# EAGLE board tiny_proto (EAGLE 4.15)
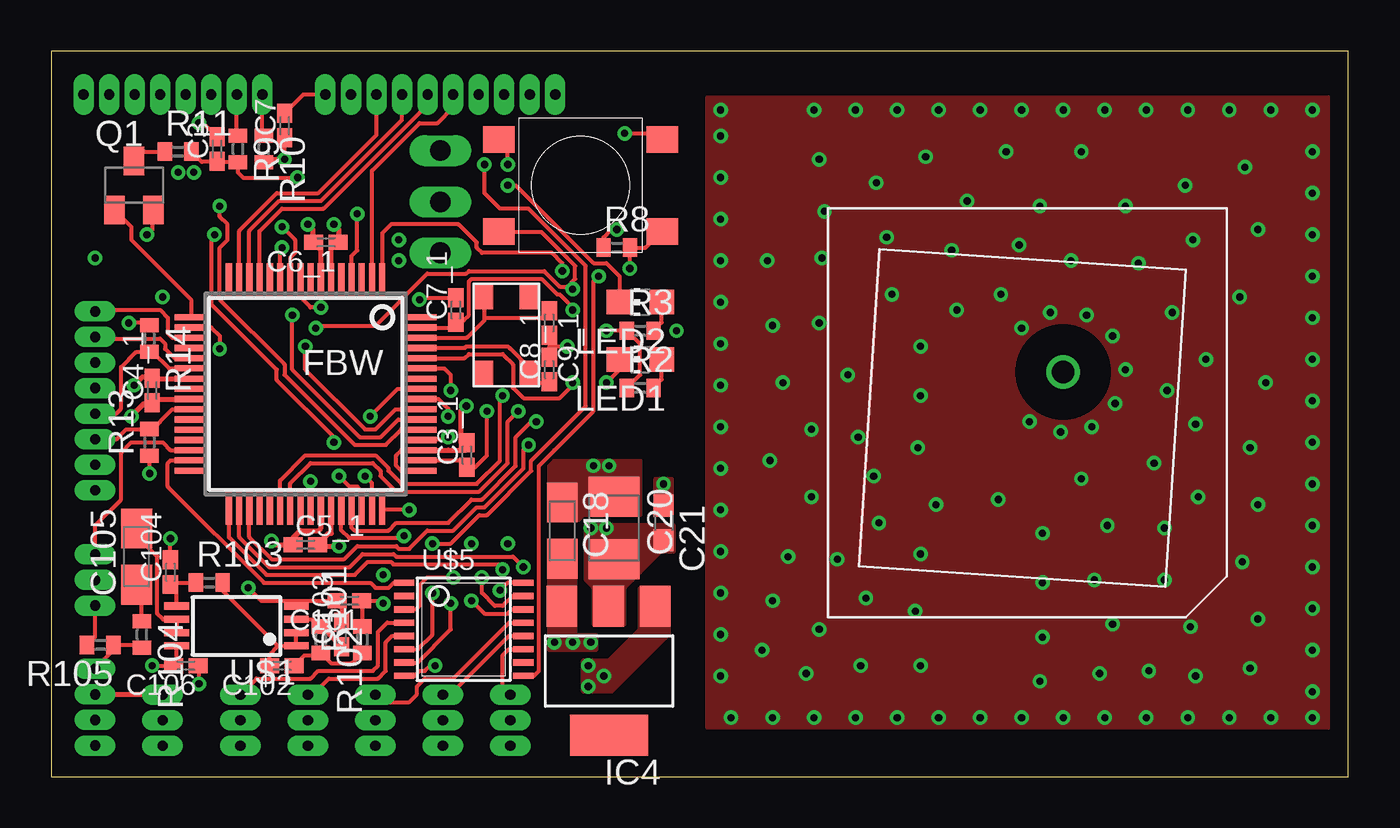
[diagram p0: board, top side]
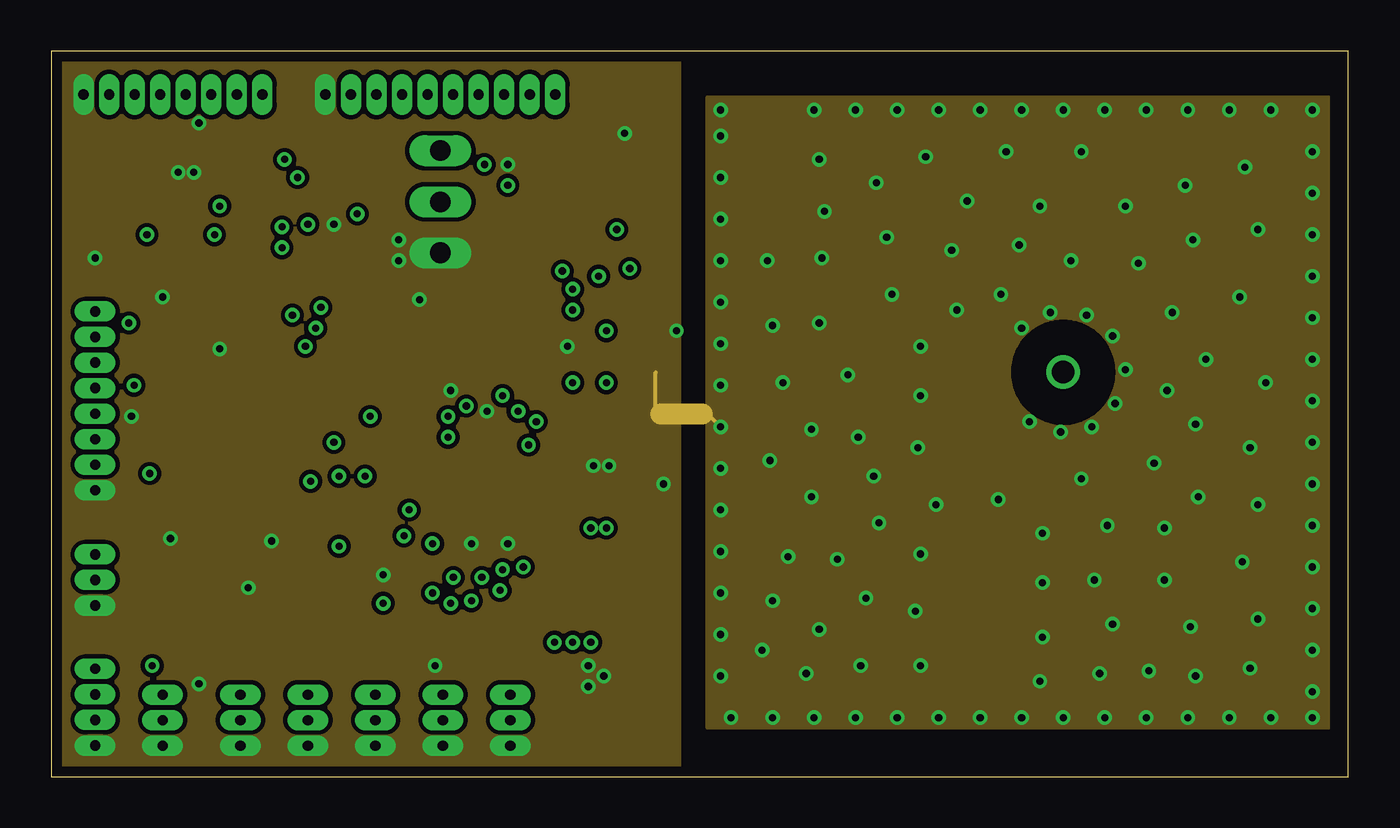
[diagram p1: board, inner layer Route2]
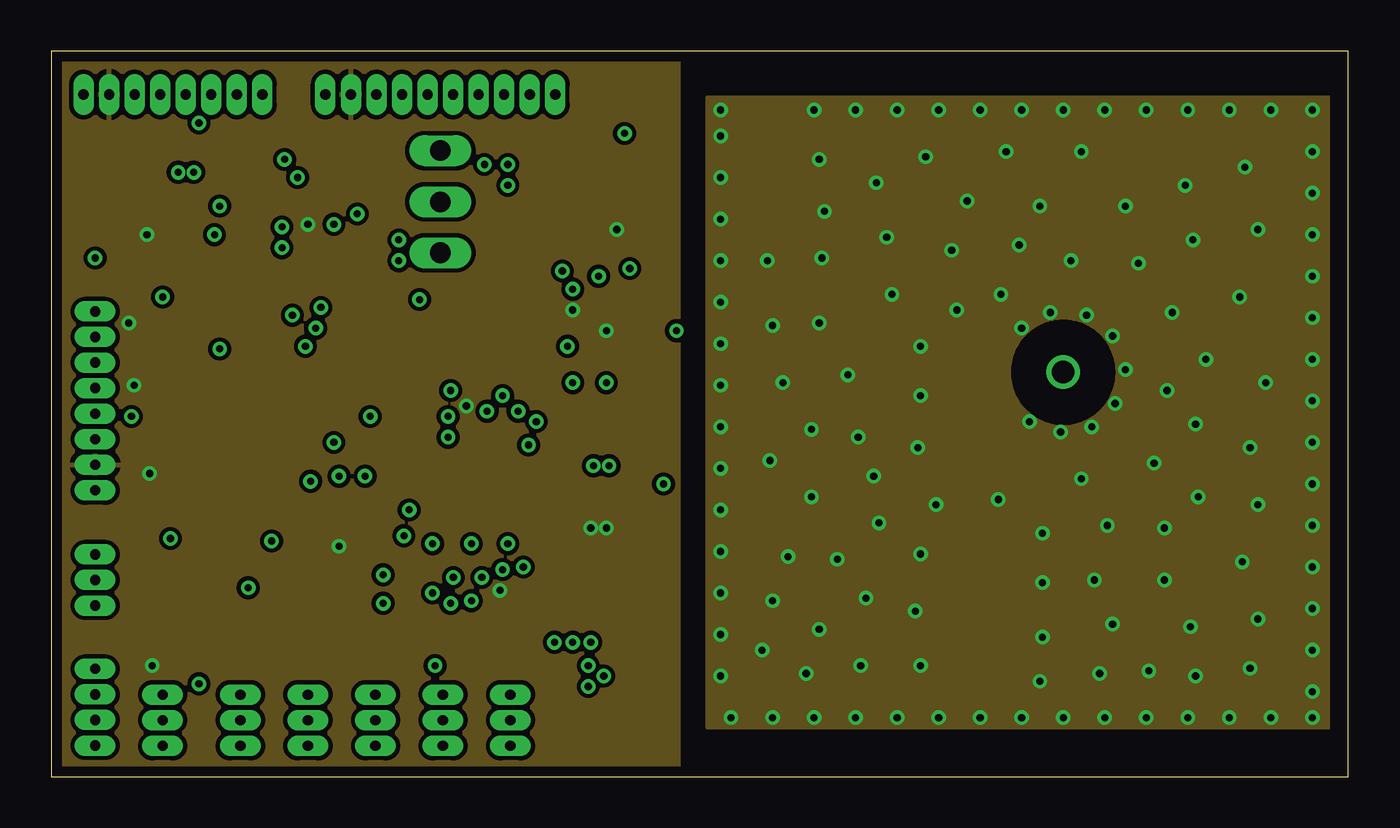
[diagram p2: board, inner layer Route15]
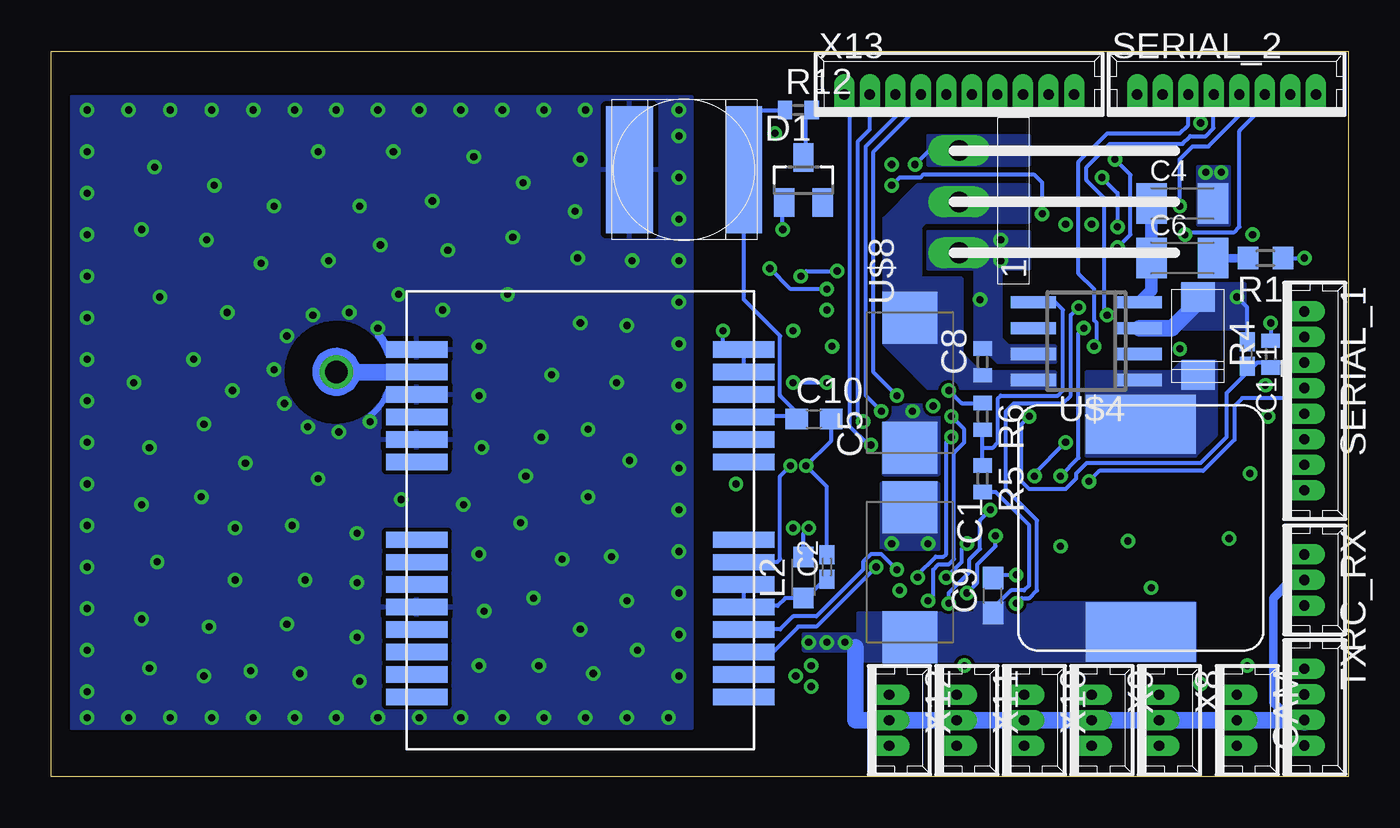
[diagram p3: board, bottom side, seen from below]

Size 63.48 x 35.48 mm. Coordinates in mm from the lower left corner, seen from the top.
Outline: 0,0 63.48,0 63.48,35.48 0,35.48 0,0
Copper layers (1*2+15*16): Top 0.035mm / dielectric 0.2mm / Route2 0.035mm / dielectric 1.5mm / Route15 0.035mm / dielectric 0.2mm / Bottom 0.035mm
Design rules "eurocircuits_verified_4l": minimum track width 0.15mm, minimum drill 0.35mm, track to track 0.15mm, track to pad 0.15mm, pad to pad 0.15mm, via to via 0.15mm, smd to smd 0.15mm, copper to edge 20mil, drill to drill 8mil, minimum pad ring 10mil, minimum via ring 7mil, stop-mask expansion 4mil, vias tented up to drill 0mil, thermal gap 10mil
tRestrict: area 47.5,17.8 to 51.6,21.8; area 48.2,18.4 to 50.9,21.2
bRestrict: 4 lines

## Footprints (pad centres in the part's own frame; a part is rotated, then mirrored left to right if it is on the bottom)
D/7343-31R = smd 2.55 x 2.7: + 3.175,0; - -3.175,0
C0402K = smd 0.925 x 0.74: 1 -0.6,0; 2 0.6,0
C1206K = smd 1.5 x 2: 1 -1.5,0; 2 1.5,0
C0402 = smd 0.7 x 0.9: 1 -0.65,0; 2 0.65,0
C0603 = smd 1.1 x 1: 1 -0.85,0; 2 0.85,0
A/3216-18R = smd 1.95 x 1.5: + 1.375,0; - -1.375,0
B/3528-21R = smd 1.95 x 2.5: + 1.525,0; - -1.525,0
PANA_J1 = smd 6.2 x 2.3: MINUS 0,-2.667 | smd 6.2 x 1.8: PLUS 0,2.921
53047-03 = drill 0.5 pad 0.698 long: 1 1.25,0; 2 0,0; 3 -1.25,0
SOT23 = smd 1 x 1.4: 1 -0.95,-1.1; 2 0.95,-1.1; 3 0,1.1
SQFP-S-10X10-64 = smd 0.3 x 1.6: 1 -3.75,-5.6; 2 -3.25,-5.6; 3 -2.75,-5.6; 4 -2.25,-5.6; 5 -1.75,-5.6; 6 -1.25,-5.6; 7 -0.75,-5.6; 8 -0.25,-5.6; 9 0.25,-5.6; 10 0.75,-5.6; 11 1.25,-5.6; 12 1.75,-5.6; 13 2.25,-5.6; 14 2.75,-5.6; 15 3.25,-5.6; 16 3.75,-5.6; 33 3.75,5.6; 34 3.25,5.6; 35 2.75,5.6; 36 2.25,5.6; 37 1.75,5.6; 38 1.25,5.6; 39 0.75,5.6; 40 0.25,5.6; 41 -0.25,5.6; 42 -0.75,5.6; 43 -1.25,5.6; 44 -1.75,5.6; 45 -2.25,5.6; 46 -2.75,5.6; 47 -3.25,5.6; 48 -3.75,5.6 | smd 1.6 x 0.3: 17 5.6,-3.75; 18 5.6,-3.25; 19 5.6,-2.75; 20 5.6,-2.25; 21 5.6,-1.75; 22 5.6,-1.25; 23 5.6,-0.75; 24 5.6,-0.25; 25 5.6,0.25; 26 5.6,0.75; 27 5.6,1.25; 28 5.6,1.75; 29 5.6,2.25; 30 5.6,2.75; 31 5.6,3.25; 32 5.6,3.75; 49 -5.6,3.75; 50 -5.6,3.25; 51 -5.6,2.75; 52 -5.6,2.25; 53 -5.6,1.75; 54 -5.6,1.25; 55 -5.6,0.75; 56 -5.6,0.25; 57 -5.6,-0.25; 58 -5.6,-0.75; 59 -5.6,-1.25; 60 -5.6,-1.75; 61 -5.6,-2.25; 62 -5.6,-2.75; 63 -5.6,-3.25; 64 -5.6,-3.75
SOT223 = smd 1.499 x 2.007: 1 -2.261,-3.15; 2 0.025,-3.15; 3 2.311,-3.15 | smd 3.81 x 2.007: 4 0,3.15
WE_PD = smd 2.9 x 5.4: P$1 -5.08,0; P$2 5.08,0
L2012C = smd 1 x 1: 1 -1,0; 2 1,0
CHIP-LED0805 = smd 1.2 x 1.2: A 0,-1.05; C 0,1.05
SC59-BEC = smd 1 x 1.4: B -0.95,-1.2; C 0,1.2; E 0.95,-1.2
R0603 = smd 1 x 1.1: 1 -0.85,0; 2 0.85,0
R1005 = smd 0.7 x 0.9: 1 -0.65,0; 2 0.65,0
R0402 = smd 0.7 x 0.9: 1 -0.65,0; 2 0.65,0
53047-08 = drill 0.5 pad 0.698 long: 1 4.375,0; 2 3.125,0; 3 1.875,0; 4 0.625,0; 5 -0.625,0; 6 -1.875,0; 7 -3.125,0; 8 -4.375,0
B3S = smd 1.55 x 1.3: P$1 4,-2.25; P$2 -4,-2.25; P$3 4,2.25; P$4 -4,2.25
53047-04 = drill 0.5 pad 0.698 long: 1 1.875,0; 2 0.625,0; 3 -0.625,0; 4 -1.875,0
TSSOP8 = smd 0.35 x 1.2: 1 -0.975,-2.925; 2 -0.325,-2.925; 3 0.325,-2.925; 4 0.975,-2.925; 5 0.975,2.925; 6 0.325,2.925; 7 -0.325,2.925; 8 -0.975,2.925
SMA = smd 1.45 x 1.65: P$1 -1.905,0; P$2 1.905,0
SO08 = smd 0.6 x 2.2: 1 -1.905,-2.6; 2 -0.635,-2.6; 3 0.635,-2.6; 4 1.905,-2.6; 5 1.905,2.6; 6 0.635,2.6; 7 -0.635,2.6; 8 -1.905,2.6
TSSOP16 = smd 0.305 x 0.991: 1 -2.275,-2.918; 2 -1.625,-2.918; 3 -0.975,-2.918; 4 -0.325,-2.918; 5 0.325,-2.918; 6 0.975,-2.918; 7 1.625,-2.918; 8 2.275,-2.918; 9 2.275,2.918; 10 1.625,2.918; 11 0.975,2.918; 12 0.325,2.918; 13 -0.325,2.918; 14 -0.975,2.918; 15 -1.625,2.918; 16 -2.275,2.918
LEA-LA = smd 3 x 0.8: 1 8,-8.65; 2 8,-7.55; 3 8,-6.45; 4 8,-5.35; 5 8,-4.25; 6 8,-3.15; 7 8,-2.05; 8 8,-0.95; 9 8,2.85; 10 8,3.95; 11 8,5.05; 12 8,6.15; 13 8,7.25; 14 8,8.35; 15 -8,8.35; 16 -8,7.25; 17 -8,6.15; 18 -8,5.05; 19 -8,3.95; 20 -8,2.85; 21 -8,-0.95; 22 -8,-2.05; 23 -8,-3.15; 24 -8,-4.25; 25 -8,-5.35; 26 -8,-6.45; 27 -8,-7.55; 28 -8,-8.65
FUTABA_BENDED = drill 1.016 long: 1 -2.54,5.715; 2 -0.051,5.715; 3 2.464,5.715
GPS_ANT_SMALL = drill 1.1 pad 1.4 round: P$1 -2,-2
CTS_CRYSTAL = smd 1.2 x 0.9: P$1 -1.85,-1.1; P$2 1.85,-1.1; P$3 1.85,1.1; P$4 -1.85,1.1
53047-10 = drill 0.5 pad 0.698 long: 1 5.625,0; 2 4.375,0; 3 3.125,0; 4 1.875,0; 5 0.625,0; 6 -0.625,0; 7 -1.875,0; 8 -3.125,0; 9 -4.375,0; 10 -5.625,0

## Placement (x,y rotation side)
C1  330uF/10V  [D/7343-31R]  21.46,10 270 bottom
C1_1  100nF  [C0402K]  4.95,20.66 270 bottom
C2  100nF  [C0402K]  25.52,10.25 90 bottom
C3  18pF  [C0402K]  8.12,30.7 90 top
C3_1  100nF  [C0402K]  20.34,15.72 90 top
C4  220pF/50V  [C1206K]  8.12,28.03 0 bottom
C4_1  100nF  [C0402K]  4.95,18.89 90 top
C5  47uF/16V  [D/7343-31R]  21.46,19.27 90 bottom
C5_1  100nF  [C0402K]  12.45,11.34 0 top
C6  22nF/50V  [C1206K]  8.12,25.36 0 bottom
C6_1  100nF  [C0402K]  13.45,26.13 180 top
C7  18pF  [C0402K]  11.42,31.84 90 top
C7_1  100nF  [C0402K]  19.81,22.82 90 top
C8  100nF  [C0402]  17.9,20.28 90 bottom
C8_1  22pF  [C0402K]  24.38,19.9 90 top
C9  100nF  [C0603]  17.39,8.85 90 bottom
C9_1  22pF  [C0402K]  24.38,22.19 270 top
C10  18pF  [C0603]  26.16,17.49 0 bottom
C18  [A/3216-18R]  25.01,12.03 270 top
C20  [B/3528-21R]  27.55,12.15 270 top
C21  100nF  [C0603]  29.97,12.41 270 top
C77  0.2F  [PANA_J1]  32.51,29.68 270 bottom
C101  3,3nF  [C0402K]  14.6,8.6 180 top
C102  220pF  [C0402K]  11.3,5.42 180 top
C103  100pF  [C0402K]  14.22,6.95 90 top
C104  1nF  [C0402K]  5.84,10 90 top
C105  10µF  [A/3216-18R]  4.19,10.76 90 top
C106  100nF  [C0402K]  6.6,5.42 180 top
CAM  [53047-03]  5.46,2.76 270 bottom
D1  BAS70  [SOT23]  26.66,29.17 0 bottom
FBW  LPC2148  [SQFP-S-10X10-64]  12.45,18.71 180 top
IC4  REG1117  [SOT223]  27.3,5.17 180 top
L1  15uH  [WE_PD]  10.15,12.15 270 bottom
L2  [L2012C]  26.66,9.74 90 bottom
LED1  [CHIP-LED0805]  28.82,20.41 90 top
LED2  [CHIP-LED0805]  28.82,23.2 90 top
Q1  DDTA143  [SC59-BEC]  4.06,28.92 0 top
R1  4.7K  [R0603]  4.06,25.36 180 bottom
R2  1K  [R1005]  28.82,19.01 0 top
R3  1K  [R1005]  28.82,21.81 0 top
R4  10k  [R1005]  3.8,20.66 90 bottom
R5  10K  [R1005]  17.9,14.57 270 bottom
R6  3.3K  [R1005]  17.9,17.61 270 bottom
R8  1K  [R1005]  27.68,25.87 0 top
R9  33R  [R1005]  9.14,30.7 270 top
R10  33R  [R1005]  10.41,30.7 270 top
R11  1.5K  [R1005]  6.22,30.57 0 top
R12  3.3K  [R1005]  26.92,32.6 0 bottom
R13  10K  [R1005]  4.82,16.35 90 top
R14  10K  [R1005]  4.82,21.43 270 top
R101  100k  [R1005]  15.24,6.69 90 top
R102  56k  [R0402]  13.2,6.69 270 top
R103  12k  [R1005]  7.74,9.49 0 top
R104  56k  [R1005]  4.44,6.95 270 top
R105  56k  [R1005]  2.41,6.44 180 top
RC_RX  [53047-03]  2.15,9.61 270 bottom
SERIAL_1  [53047-08]  2.15,18.38 270 bottom
SERIAL_2  [53047-08]  5.96,33.36 0 bottom
SW1  B3S  [B3S]  25.9,28.92 180 top
TX  [53047-04]  2.15,3.39 270 bottom
U$1  AD8552RU  [TSSOP8]  9.07,7.37 90 top
U$2  STPS2L  [SMA]  7.36,21.55 270 bottom
U$4  L5973D  [SO08]  12.82,21.3 90 bottom
U$5  CD4015B  [TSSOP16]  20.19,7.2 270 top
U$6  LEA-4P  [LEA-LA]  37.59,12.54 0 bottom
U$8  FUTABA_BEND  [FUTABA_BENDED]  13.33,28.16 90 bottom
U$15  GPS_PATCH  [GPS_ANT_SMALL]  47.52,17.79 180 top
U$19  CRYSTAL_CTS  [CTS_CRYSTAL]  22.27,21.6 90 top
X8  [53047-03]  9.27,2.76 270 bottom
X9  [53047-03]  12.57,2.76 270 bottom
X10  [53047-03]  15.87,2.76 270 bottom
X11  [53047-03]  19.17,2.76 270 bottom
X12  [53047-03]  22.47,2.76 270 bottom
X13  [53047-10]  19.05,33.36 0 bottom

## Library data of the parts
C1 C1_1 C2 C3 C3_1 C4 C4_1 C5 C5_1 C6 C6_1 C7 C7_1 C8 C8_1 C9 C9_1 C10 C18 C20 C21 C101-C106 L2 R1-R6 R8-R14 R101-R105 = rcl
C77 FBW L1 SW1 U$1 U$2 U$4-U$6 U$8 U$15 U$19 = paparazzi
CAM RC_RX SERIAL_1 SERIAL_2 TX X8-X13 = con-molex
D1 = diode
IC4 = burr-brown
LED1 LED2 = led
Q1 = transistor-pnp

## Nets
+3V3: C3_1.2 C4_1.2 C5_1.2 C6_1.2 C7_1.1 C20.+ C21.2 C106.2 D1.1 FBW.7 FBW.23 FBW.43 FBW.49 FBW.51 FBW.63 IC4.2 L2.2 Q1.E R2.1 R3.1 R4.2 R8.1 R13.1 R14.1 SERIAL_1.2 SERIAL_2.2 U$1.8 U$5.16 X13.2
+5V: C1.+ C9.1 C18.+ CAM.2 IC4.3 L1.P$2 R5.2 RC_RX.2 TX.2 X8.2 X9.2 X10.2 X11.2 X12.2
ADC_0: FBW.15 X13.3
ADC_1: FBW.14 X13.4
ADC_2: FBW.13 X13.5
ADC_3: FBW.2 X13.6
ADC_4: FBW.38 X13.7
ADC_5: FBW.39 X13.8
ADC_6: FBW.45 X13.9
ADC_7: FBW.35 X13.10
AUDIO: R104.2 R105.1 TX.4
BUTTON: FBW.46 R8.2 SW1.P$3 SW1.P$4
GND: C1.- C1_1.1 C2.2 C3.2 C3_1.1 C4.2 C4_1.1 C5.- C5_1.1 C6_1.1 C7.2 C7_1.2 C8.2 C8_1.2 C9.2 C9_1.2 C10.2 C18.- C20.- C21.1 C77.MINUS C101.2 C103.2 C104.2 C106.1 CAM.1 FBW.6 FBW.18 FBW.25 FBW.42 FBW.50 FBW.59 IC4.1 R1.1 R6.1 R105.2 RC_RX.1 SERIAL_1.1 SERIAL_2.1 SW1.P$1 SW1.P$2 TX.1 U$1.4 U$2.P$1 U$4.3 U$4.7 U$5.8 U$6.7 U$6.13 U$6.14 U$6.15 U$6.17 U$6.19 U$6.24 U$8.1 X8.1 X9.1 X10.1 X11.1 X12.1 X13.1
LED_1: FBW.60 LED1.C
LED_2: FBW.4 LED2.C
LPC_AUDIO: C101.1 FBW.9 R101.2
LPC_CLOCK: C8_1.1 FBW.61 U$19.P$1
LPC_MISO: FBW.53 SERIAL_2.4
LPC_MOSI: FBW.54 SERIAL_2.5
LPC_P0.14: FBW.41 SERIAL_1.5
LPC_RESET: C1_1.2 FBW.57 R4.1 SERIAL_1.6
LPC_RXD_0: FBW.21 SERIAL_1.7
LPC_RXD_1: FBW.34 U$6.3
LPC_SCK: FBW.47 SERIAL_2.3
LPC_SCL0: FBW.22 R14.2 SERIAL_1.4
LPC_SDA0: FBW.26 R13.2 SERIAL_1.3
LPC_SERV0_CLOCK: FBW.1 U$5.9
LPC_SERV0_DATA: FBW.48 U$5.7
LPC_SERV0_RESET: FBW.44 U$5.6
LPC_SERV1_CLOCK: FBW.31 U$5.1
LPC_SERV1_DATA: FBW.52 U$5.15
LPC_SERV1_RESET: FBW.56 U$5.14
LPC_SSEL: FBW.55 SERIAL_2.6
LPC_TXD_0: FBW.19 SERIAL_1.8
LPC_TXD_1: FBW.33 U$6.4
LPC_USB_CONNECT: FBW.17 Q1.B
LPC_USB_N: C7.1 FBW.11 R10.2
LPC_USB_P: C3.1 FBW.10 R9.2 R11.2
N$1: C2.1 L2.1 U$6.5 U$6.6
N$3: U$6.16 U$15.P$1
N$5: C9_1.1 FBW.62 U$19.P$3
N$6: C4.1 C6.1 U$4.4
N$7: Q1.C R11.1
N$8: C6.2 R1.2
N$9: L1.P$1 U$2.P$2 U$4.1
N$10: R5.1 R6.2 U$4.5
N$11: FBW.27
N$12: FBW.29
N$14: C105.+ U$1.6 U$1.7
N$15: C102.2 R103.2 U$1.1 U$1.2
N$16: C102.1 R101.1 R102.2
N$17: C103.1 R102.1 U$1.3
N$18: C105.- R104.1
N$19: C104.1 R103.1 U$1.5
N$21: LED1.A R2.2
N$22: LED2.A R3.2
N$28: C10.1 C77.PLUS R12.1 U$6.11
N$29: D1.3 R12.2
PPM_IN: FBW.30 RC_RX.3
SERV_0: U$5.5 X9.3
SERV_1: U$5.4 X8.3
SERV_2: U$5.3 U$8.3
SERV_3: U$5.10
SERV_4: U$5.13 X10.3
SERV_5: U$5.12 X11.3
SERV_6: U$5.11 X12.3
SERV_7: U$5.2
USB+: R9.1 SERIAL_2.7
USB-: R10.1 SERIAL_2.8
VBAT: C5.+ C8.1 U$4.8 U$8.2
VCC_RF: U$6.18
VDD18OUT: U$6.8
VIDEO: CAM.3 TX.3

## Tracks (layer width: path | path; a pad name or v marks a point on that pad's centre or on a via)
+3V3  (via drill 0.35)
  Top 0.203: v4.82,14.82 R13.1 | v4.95,5.42 5.96,5.42 | 5.96,5.42 C106.2 | U$1.8 6.15,5.42 5.96,5.42 | Q1.E 4.95,27.66 4.95,26.76 v4.69,26.5 | 5,19.46 4.95,19.52 C4_1.2 | R14.1 4.71,22.19 v3.8,22.19 | FBW.49 17.12,14.96 16.89,15.2 16.89,15.71 17.14,15.96 FBW.51 | 12.82,26.12 C6_1.2 | 20.32,16.29 C3_1.2 | 19.43,15.96 | C3_1.2 20.57,16.32 | v27.68,26.76 27.43,26.76 27.03,26.36 R8.1 | U$5.16 22.34,9.48 v21.97,9.11 | v27.17,21.81 R3.1 28.19,21.81 28.82,21.17 28.82,19.65 28.19,19.01 R2.1 | C3_1.2 20.32,16.35 | v25.52,22.82 25.52,22.95 24.89,23.58 24.76,23.58 24,24.35 20.57,24.35 20.44,24.22 20.44,22.57 20.19,22.31 19.81,22.31 C7_1.1 19.81,22.19 19.58,21.96 FBW.63 | C5_1.2 13.05,11.36 | 13.05,11.29 13.08,11.27
  Top 0.254: 5,19.46 FBW.23 | 4.95,19.52 4.44,19.52 v4.06,19.14 | FBW.51 19.43,15.96 | v12.57,27.01 12.82,26.76 12.82,26.12 | FBW.7 13.2,25.74 12.82,26.12 | 20.32,16.29 20.32,15.96 19.43,15.96 | FBW.43 13.7,11.89 13.58,11.89 13.05,11.36 | 20.32,16.35 20.06,16.35 20.06,17.87 v20.32,18.12 | C5_1.2 13.05,11.29 | 13.08,11.27 v14.09,11.27 | 12.82,26.12 12.83,26.13 C6_1.2
  Bottom 0.203: D1.1 27.68,28.01 v27.68,26.76 | L2.2 26.66,11.9 v26.41,12.15 | v3.8,22.19 R4.2
  other vias: 27.17,12.15
  pour Route15 (isolate 0.203): 0.38,0.34 30.73,0.34 30.73,35.14 0.38,35.14
  pour Top (isolate 0.203, no thermals): 26.16,12.28 26.16,9.61 26.54,9.23 26.54,7.46 28.06,7.46 28.06,9.23 29.84,11.01 30.48,11.01 30.48,12.28
+5V  (via drill 0.35)
  Bottom 0.203: R5.2 17.25,13.92 15.62,12.28 15.62,9.36 15.87,9.11 16.51,9.11 17.27,8.34
  Bottom 0.406: 2.15,2.76 2.79,2.76 3.68,3.64 3.68,8.73 2.79,9.61 RC_RX.2
  Bottom 0.813: 24.12,2.76 X11.2 X10.2 X9.2 X8.2 CAM.2 2.15,2.76 | 24.12,2.76 X12.2 | 24.12,2.76 24.12,6.31
  Bottom 1.016: TX.2 2.15,2.76
  other vias: 25.52,6.57 24.63,6.57 26.41,6.57
  pour Bottom (no thermals): 7.49,8.47 18.28,8.47 18.28,7.96 24,7.96 24,6.95 26.66,6.95 26.66,6.19 24,6.19 24,5.68 7.49,5.68
  pour Top (no thermals): 24.38,6.19 24.38,11.52 25.65,11.52 25.65,6.95 26.66,6.95 26.66,6.19
ADC_0
  Top 0.203: FBW.15 9.2,26.7 11.04,28.54 13.08,28.54 15.92,31.38 X13.3
ADC_1
  Top 0.203: FBW.14 9.7,26.69 11.17,28.16 13.2,28.16 17.17,32.12 X13.4
ADC_2
  Top 0.203: FBW.13 10.2,26.68 11.3,27.78 13.33,27.78 18.42,32.86 X13.5
ADC_3
  Top 0.203: FBW.2 15.7,29.64 18.03,31.97 18.92,31.97 19.68,32.73 19.68,33.36 X13.6
ADC_4  (via drill 0.35)
  Top 0.203: v22.09,18.63 21.97,18.5 21.97,15.46 20.82,14.31 17.14,14.31 16.51,14.95 16.51,15.07 15.87,15.71 12.44,15.71 11.2,14.47 FBW.38
  Bottom 0.203: X13.7 20.92,32.89 23.24,30.57 23.24,19.77 v22.09,18.63
ADC_5  (via drill 0.35)
  Top 0.203: v22.86,17.87 22.35,17.36 22.35,15.33 20.95,13.93 16.89,13.93 16.12,14.69 16.12,14.95 15.74,15.33 12.7,15.33 11.7,14.34 FBW.39
  Bottom 0.203: X13.8 22.17,32.4 22.14,32.4 22.09,32.35 23.62,30.82 23.62,18.63 v22.86,17.87
ADC_6  (via drill 0.35)
  Top 0.203: FBW.45 14.7,12.18 14.85,12.03 16.51,12.03 16.89,12.41 19.43,12.41 20.57,13.55 21.08,13.55 22.73,15.2 22.73,16.6 23.49,17.36 v23.74,17.36
  Bottom 0.203: v23.74,17.36 24,17.61 24,31.08 23.42,31.65 X13.9
ADC_7  (via drill 0.35)
  Top 0.203: v23.36,16.22 23.11,15.96 23.11,15.07 21.2,13.17 20.82,13.17 19.68,12.03 18.41,12.03 17.52,11.14 17.01,11.14 16.89,11.27 14.98,11.27 14.35,10.63 10.79,10.63 9.7,11.72 FBW.35
  Bottom 0.203: v23.36,16.22 23.49,16.22 24.38,17.11 24.38,33.11 24.63,33.36 X13.10
AUDIO
  Top 0.203: R105.1 3.04,6.44 | TX.4 2.15,5.3 3.04,6.19 | R105.1 3.06,6.2 3.04,6.19 | 3.04,6.19 3.04,6.42 R105.1 | R104.2 4.44,6.31 4.31,6.44 R105.1
BUTTON  (via drill 0.35)
  Top 0.203: FBW.46 15.2,13.96 14.98,14.19 14.6,14.19 v14.09,14.69 | v12.95,21.93 13.08,22.06 15.87,22.06 18.41,24.6 20.32,24.6 20.44,24.73 24.12,24.73 24.89,23.96 25.27,23.96 | 25.27,23.96 25.65,24.35 25.65,24.98 24,26.63 21.94,26.63 SW1.P$3 21.88,26.67 21.84,26.63 | SW1.P$4 29.88,26.67 29.08,25.87 R8.2 v28.32,24.85 | 25.27,23.96 25.4,23.96 v25.52,23.84
  Bottom 0.203: v14.09,14.69 13.2,15.58 13.2,21.68 v12.95,21.93 | v28.32,24.85 27.3,23.84 v25.52,23.84
GND  (via drill 0.35)
  Top 0.203: R105.2 2.15,6.84 RC_RX.1 | C104.2 v5.84,11.65 | C103.2 14.22,8.34 13.97,8.6 | 13.97,8.6 C101.2 | U$1.4 12.25,8.6 13.97,8.6 | 11.55,8.34 11.56,8.34 U$1.4 | 13.46,33.36 X13.1 12.35,33.36 C7.2 | 14.22,26.12 14.09,26.12 C6_1.1 13.97,26.13 | C3.2 7.45,31.97 v7.23,31.97 | 5.16,18.46 4.95,18.25 C4_1.1 | C106.1 7.23,5.42 v7.23,4.53 | FBW.59 19.24,19.96 19.55,19.65 v19.55,18.89 | FBW.50 20.32,15.46 20.32,15.12 C3_1.1 20.74,15.12 21.33,15.71 v21.33,17.87 | U$5.8 17.79,4.93 18.03,5.17 18.28,5.17 18.54,5.42 v18.79,5.42 | v8.25,20.92 8.25,21.55 7.84,21.96 FBW.18 | SW1.P$1 22.35,30.72 v22.35,29.93 | SW1.P$2 29.61,31.46 v28.06,31.46 | C9_1.2 24.38,21.04 | 24.38,21.04 C8_1.2 | 24.38,21.04 v25.27,21.04 | C7_1.2 18.12,23.42 v18.03,23.33 | U$1.4 12.19,8.53 12.19,8.6 10.28,8.6 v9.65,9.23
  Top 0.254: 5.16,18.46 FBW.25 | 4.95,18.25 4.57,18.25 v3.93,17.61 | FBW.6 13.7,25.86 13.97,26.13 | v13.84,27.01 14.09,26.76 14.09,26.12 | v10.79,11.52 10.97,11.34 C5_1.1 11.85,11.69 12.19,12.03 13.08,12.03 13.2,12.16 FBW.42
  Route2 0.203: 31.87,17.74 32.13,17.74 v32.76,17.11 | 29.84,17.74 29.59,18 29.59,19.77
  Route2 1.016: 29.84,17.74 31.87,17.74
  Bottom 0.203: R1.1 v2.15,25.36 | C10.2 25.31,16.43 v26.54,15.2 25.52,14.19 C2.2 | U$6.7 27.95,10.48 27.81,10.63 27.81,14.69 v27.3,15.2 | C1_1.1 4.95,22.95 v5.46,23.46 | C9.2 17.23,9.87 v16.25,9.87 | R6.1 18.93,18.27 v19.55,18.89 | 29.59,20.92 U$6.14 | 29.59,20.92 U$6.13 29.59,20.92 | 29.59,20.92 | 29.59,20.92 30.6,20.92 v30.6,21.81
  Bottom 0.305: 47.86,17.67 arc-36 46.97,18.92
  Bottom 0.406: 47.44,21.57 arc21 46.95,20.71
  Bottom 0.813: U$2.P$1 7.36,23.2 8.63,21.93 U$4.3
  other vias: 29.97,14.31 17.01,26.25 17.01,25.24 6.98,29.55 6.22,29.55 20.57,11.39 22.35,11.39 26.28,5.42 26.28,4.41 27.05,4.92 47.49,21.93 48.89,22.7 50.67,22.57 51.94,21.55 52.57,19.9 47.87,17.36 49.4,16.85 50.92,17.11 52.06,18.25 37.33,32.6 39.37,32.6 41.4,32.6 43.43,32.6 45.46,32.6 47.49,32.6 49.53,32.6 51.56,32.6 53.59,32.6 55.62,32.6 57.65,32.6 59.69,32.6 61.72,32.6 61.72,30.57 61.72,28.54 61.72,26.5 61.72,24.47 61.72,22.44 61.72,20.41 61.72,18.38 61.72,16.35 61.72,14.31 61.72,12.28 61.72,10.25 61.72,8.22 61.72,6.19 61.72,4.15 61.72,2.88 59.69,2.88 57.65,2.88 55.62,2.88 53.59,2.88 51.56,2.88 49.53,2.88 47.49,2.88 45.46,2.88 43.43,2.88 41.4,2.88 39.37,2.88 37.33,2.88 35.3,2.88 33.27,2.88 32.76,4.92 32.76,6.95 32.76,8.98 32.76,11.01 32.76,13.04 32.76,15.07 32.76,19.14 32.76,21.17 32.76,23.2 32.76,25.24 32.76,27.27 32.76,29.3 32.76,31.33 32.76,32.6 54.48,9.61 48.38,4.66 48.51,6.82 48.51,9.49 48.51,11.9 46.35,13.55 43.3,13.3 42.54,10.88 42.29,8.09 42.54,5.42 39.62,5.42 36.95,5.04 34.79,6.19 35.3,8.6 37.59,7.2 39.87,8.73 38.48,10.63 36.06,10.76 40.51,12.41 42.41,16.09 42.54,18.63 42.54,21.04 44.32,22.82 46.48,23.58 51.3,5.04 53.72,5.17 56,4.92 58.67,5.3 59.05,7.71 55.75,7.33 51.94,7.46 51.05,9.61 51.68,12.28 58.29,10.5 59.05,13.3 56.13,13.68 50.41,14.57 53.97,15.33 56,17.23 58.67,16.09 59.43,19.27 56.51,20.41 54.61,18.89 54.86,22.7 58.16,23.46 59.05,26.76 58.42,29.81 55.88,26.25 53.21,25.11 49.91,25.24 52.57,27.9 55.49,28.92 50.41,30.57 48.38,27.9 46.73,30.57 37.21,13.68 35.17,15.46 39.49,16.6 35.81,19.27 38.98,19.65 41.14,23.58 37.59,22.19 35.05,25.24 37.71,25.36 37.84,27.65 37.59,30.19 35.3,22.06 40.89,26.38 44.06,25.74 47.37,26 44.83,28.16 40.38,29.04 42.79,30.32 37.21,16.98 54.48,12.15 40.25,14.69
  pour Route2 (isolate 0.203, no thermals): 0.38,35.09 30.73,35.09 30.73,0.27 0.4,0.27
  pour Bottom (no thermals): 20.06,14.82 20.06,18.12 22.73,18.12 22.73,14.82
  pour Bottom (no thermals): 20.06,14.31 22.86,14.31 22.86,11.14 20.06,11.14
  pour Top (no thermals): 24.38,12.54 24.38,15.2 24.63,15.46 28.82,15.46 28.82,12.79 26.03,12.79 25.78,12.54
  pour Top (no thermals): 29.59,12.79 29.59,14.57 30.35,14.57 30.35,12.79
  pour Bottom (no thermals): 5.84,27.01 5.84,29.81 7.36,29.81 7.36,27.01
  pour Bottom (no thermals): 15.62,26.63 20.57,26.63 20.57,24.85 18.28,24.85 18.28,20.79 17.65,20.79 17.14,20.28 14.35,20.28 14.35,21.04 16.63,21.04 17.01,21.43 17.01,24.6 16.76,24.85 15.62,24.85
  pour Bottom (no thermals): 5.08,24.09 8.12,24.09 8.12,21.93 5.08,21.93
  pour Top (no thermals): 28.82,9.23 30.22,9.23 30.22,7.33 30.22,6.95 27.43,4.15 26.03,4.15 26.03,5.68 27.3,5.68 28.82,7.2
  pour Top (isolate 0.203): 32.13,33.24 62.48,33.24 62.48,2.38 32.13,2.38
  pour Bottom (isolate 0.203): 32.13,33.24 62.48,33.24 62.48,2.38 32.13,2.38
  pour Route15 (isolate 0.203, no thermals): 32.13,33.24 49.53,33.24 49.53,22.44 arc180 49.53,17.11 49.53,2.38 32.13,2.38
  pour Route15: 49.53,33.24 62.48,33.24 62.48,2.38 49.53,2.38 49.53,17.11 arc180 49.53,22.44
  pour Route2 (isolate 0.203): 32.13,33.24 49.53,33.24 49.53,22.44 arc180 49.53,17.11 49.53,2.38 32.13,2.38
  pour Route2 (isolate 0.203): 49.53,33.24 62.48,33.24 62.48,2.38 49.53,2.38 49.53,17.11 arc180 49.53,22.44
LED_1  (via drill 0.35)
  Top 0.203: FBW.60 20.24,20.46 20.44,20.66 22.09,20.66 22.6,20.15 22.6,19.01 23.11,18.5 24.89,18.5 25.52,19.14 v25.52,19.27 | LED1.C 27.81,20.41 27.81,19.9 v27.17,19.27
  Bottom 0.203: v25.52,19.27 v27.17,19.27
LED_2  (via drill 0.35)
  Top 0.203: FBW.4 14.7,25.47 14.98,25.74 v14.98,27.52 | v22.35,28.92 22.73,28.92 26.54,25.11 27.17,25.11 27.81,24.47 27.81,23.2 LED2.C
  Bottom 0.203: v14.98,27.52 14.98,29.04 15.36,29.43 20.82,29.43 20.95,29.3 21.97,29.3 v22.35,28.92
LPC_AUDIO  (via drill 0.35)
  Top 0.203: R101.2 15.24,8.6 C101.1 16.12,8.6 v16.25,8.47 | v13.2,22.95 12.7,22.95 12.2,23.44 FBW.9
  Bottom 0.203: v16.25,8.47 16,8.73 15.62,8.73 15.24,9.11 15.24,12.54 16.76,14.06 16.76,17.87 16.38,18.25 13.97,18.25 13.58,18.63 13.58,22.57 v13.2,22.95
LPC_CLOCK
  Top 0.203: C8_1.1 24.38,19.27 23.73,19.27 23.36,19.63 23.36,19.77 | 22.47,20.92 23.36,20.03 23.36,19.77 | 22.47,20.92 22.43,20.96 | 23.36,19.77 23.36,19.75 U$19.P$1 | FBW.61 20.23,20.96 20.32,21.04 22.35,21.04 22.47,20.92
LPC_MISO  (via drill 0.35)
  Top 0.203: FBW.53 17.12,16.96 16.38,16.22 14.85,16.22 11.42,19.65 11.42,20.15 8.25,23.33 8.25,25.87 8.63,26.25 8.63,27.01 8.25,27.39 v8.25,27.9
  Bottom 0.203: SERIAL_2.4 5.34,32.34 6.85,30.82 7.62,30.82 8.25,30.19 v8.25,27.9
LPC_MOSI  (via drill 0.35)
  Top 0.203: v11.81,22.57 11.81,19.9 15.11,16.6 16.12,16.6 16.99,17.46 FBW.54
  Bottom 0.203: SERIAL_2.5 6.6,33.36 6.6,31.71 6.98,31.33 7.74,31.33 8.12,30.95 11.68,30.95 12.82,29.81 12.82,29.17 11.93,28.28 11.93,22.7 v11.81,22.57
LPC_P0.14  (via drill 0.35)
  Top 0.203: FBW.41 v12.7,14.43 v12.7,14.44
  Bottom 0.203: v12.7,14.44 12.19,14.95 7.11,14.95 5.58,16.47 5.58,18.12 5.2,18.5 3.17,18.5 2.67,19 SERIAL_1.5
LPC_RESET  (via drill 0.35)
  Top 0.203: FBW.57 16.97,18.96 v15.62,17.61
  Bottom 0.203: SERIAL_1.6 3.8,20.25 | 3.8,20.25 4.47,20.25 4.95,19.77 | 4.95,19.77 5.96,18.76 5.96,16.6 7.23,15.33 12.82,15.33 13.33,14.82 13.33,14.57 13.84,14.06 15.62,14.06 16,14.44 16,17.23 v15.62,17.61 | 3.8,20.25 R4.1 | 4.95,19.77 C1_1.2
LPC_RXD_0
  Top 0.203: FBW.21 6.04,20.46 5.58,20.92 5.58,21.17 5.33,21.43 2.23,21.43 SERIAL_1.7
LPC_RXD_1  (via drill 0.35)
  Top 0.203: v23.11,10.25 22.6,10.76 16.89,10.76 16.76,10.88 15.24,10.88 14.6,10.25 10.66,10.25 9.2,11.71 FBW.34
  Bottom 0.203: U$6.3 28.16,6.09 26.92,7.33 26.03,7.33 v23.11,10.25
LPC_SCK  (via drill 0.35)
  Top 0.203: v13.84,16.35 13.84,16.6 11.04,19.39 11.04,19.9 7.87,23.08 7.87,26.38 v8,26.5 | FBW.47 15.7,14.35 v15.36,14.69
  Bottom 0.203: SERIAL_2.3 4.09,32.83 5.33,31.59 5.33,26.89 5.58,26.63 7.87,26.63 v8,26.5 | v13.84,16.35 15.36,14.82 v15.36,14.69
LPC_SCL0
  Top 0.203: R14.2 4.93,20.78 4.95,20.79 5.77,19.96 FBW.22 | SERIAL_1.4 3.18,17.75 3.42,18 3.42,20.03 4.17,20.78 R14.2 | R14.2 4.82,20.79
LPC_SDA0
  Top 0.203: SERIAL_1.3 3.2,16.5 3.68,16.98 4.82,16.98 R13.2 4.82,16.85 5.93,17.96 FBW.26
LPC_SERV0_CLOCK  (via drill 0.35)
  Top 0.203: U$5.9 23.63,4.93 23.87,5.17 23.87,15.2 | 23.87,15.2 24.63,15.96 | v26.79,24.47 26.54,24.22 26.54,17.87 23.87,15.2 | FBW.1 16.2,26.59 16.63,27.01 19.93,27.01 20.82,26.12 20.82,25.87 21.08,25.62 24.51,25.62 25.01,25.11 v25.01,24.73
  Bottom 0.203: v26.79,24.47 26.54,24.73 v25.01,24.73
LPC_SERV0_DATA  (via drill 0.35)
  Top 0.203: FBW.48 16.27,13.04 v17.52,13.04 | v19.55,8.47 19.55,7.2 17.93,5.58 U$5.7
  Bottom 0.203: v17.52,13.04 18.03,12.54 18.03,11.14 18.54,10.63 18.54,10 19.55,8.98 v19.55,8.47
LPC_SERV0_RESET  (via drill 0.35)
  Top 0.203: FBW.44 14.2,12.04 14.6,11.65 17.14,11.65 v17.27,11.77 | U$5.6 17.94,6.23 18.66,6.95 v18.66,8.98
  Bottom 0.203: v18.66,8.98 18.16,9.49 18.16,10.38 17.27,11.27 v17.27,11.77
LPC_SERV1_CLOCK
  Top 0.203: U$5.1 16.75,9.48 16.51,9.23 15.87,9.23 15.63,9.48 10.42,9.48 5.71,14.19 5.71,15.33 5.85,15.46 FBW.31
LPC_SERV1_DATA  (via drill 0.35)
  Top 0.203: FBW.52 19.3,16.47 v19.43,16.6 | U$5.15 22.58,8.83 22.09,8.34 21.71,8.34 21.08,8.98 v21.08,9.74
  Bottom 0.203: v19.43,16.6 19.68,16.35 19.68,10.88 19.81,10.76 20.19,10.76 21.08,9.87 v21.08,9.74
LPC_SERV1_RESET  (via drill 0.35)
  Top 0.203: FBW.56 18.96,18.46 19.43,18 v19.43,17.61 | U$5.14 22.56,8.18 22.35,7.96 21.2,7.96 v20.57,8.6
  Bottom 0.203: v20.57,8.6 20.32,8.85 20.32,10.12 20.06,10.38 19.55,10.38 19.3,10.63 19.3,15.84 18.79,16.35 18.79,16.98 v19.43,17.61
LPC_SSEL  (via drill 0.35)
  Top 0.203: v12.44,21.04 12.44,19.9 15.36,16.98 15.87,16.98 16.85,17.96 FBW.55
  Bottom 0.203: v12.44,21.04 12.31,21.17 12.31,22.19 12.44,22.31 12.44,23.84 13.2,24.6 13.2,30.06 11.81,31.46 8.25,31.46 7.84,31.87 SERIAL_2.6
LPC_TXD_0
  Top 0.203: FBW.19 5.92,21.46 5.71,21.68 5.71,22.44 5.33,22.82 2.22,22.82 SERIAL_1.8
LPC_TXD_1  (via drill 0.35)
  Top 0.203: FBW.33 8.7,11.7 10.54,9.87 14.85,9.87 15.49,10.5 16.63,10.5 16.76,10.38 21.97,10.38 22.09,10.25 v22.09,10.12
  Bottom 0.203: U$6.4 29.59,7.2 27.81,7.2 27.17,7.84 26.03,7.84 23.74,10.12 23.74,10.5 23.36,10.88 22.86,10.88 v22.09,10.12
LPC_USB_CONNECT
  Top 0.203: 3.17,27.27 3.17,27.78 Q1.B 3.05,27.78 3.04,27.78 3.93,26.89 3.93,26.25 6.85,23.33 FBW.17 | FBW.17 6.85,22.44 | FBW.17
LPC_USB_N  (via drill 0.35)
  Top 0.203: R10.2 10.41,30.19 v11.42,30.19 C7.1 | FBW.11 11.2,25.78 v11.3,25.87
  Bottom 0.203: v11.3,25.87 10.66,26.5 10.66,29.43 v11.42,30.19
LPC_USB_P  (via drill 0.35)
  Top 0.203: FBW.10 11.7,25.39 11.93,25.62 11.93,26.25 v11.3,26.89 | v12.06,29.3 9.39,29.3 9.14,29.55 R9.2 9.14,30.06 8.16,30.06 C3.1 8.12,30.06 7.38,30.06 R11.2
  Bottom 0.203: v11.3,26.89 11.3,28.54 v12.06,29.3
N$1
  Bottom 0.203: U$6.6 29.59,8.34 | U$6.5 29.59,8.34 | 26.66,8.73 26.66,8.6 25.61,9.65 C2.1 | 29.59,8.34 27.94,8.34 27.55,8.73 26.66,8.73 | 26.66,8.73 L2.1
N$3
  Bottom 0.203: 48.55,19.79 49.51,19.79 arc90 49.53,19.77 | 49.53,19.77 arc90 49.53,19.77 | U$15.P$1 49.53,19.77
  Bottom 0.406: 48.55,19.79 arc-354 48.56,19.68
  Bottom 0.8: U$15.P$1 arc90 U$15.P$1 | U$15.P$1 | U$6.16 U$15.P$1 arc90 U$15.P$1
N$5
  Top 0.203: FBW.62 20.35,21.46 21.2,22.31 21.2,22.44 | C9_1.1 24.38,22.95 | C9_1.1 24.38,22.7 | C9_1.1 24.38,22.44 21.2,22.44 | U$19.P$3 21.19,23.45 21.2,23.46 21.2,22.44
N$6
  Bottom 0.61: 9.65,25.39 9.65,25.49 | U$4.4 9.65,23.78 9.65,25.39 | 9.65,28.05 9.65,28.16 | 9.65,28.05 C4.1 | C6.1 9.65,25.39 | 9.65,25.39 9.65,28.05
N$7
  Top 0.203: Q1.C 4.06,30.06 4.57,30.57 R11.1
N$8
  Bottom 0.406: R1.2 C6.2
N$9
  pour Bottom (no thermals): 6.47,20.28 8.12,20.28 8.63,19.77 12.82,19.77 12.82,15.71 7.49,15.71 6.47,16.73
N$10
  Bottom 0.203: U$4.5 14.35,23.2 13.97,22.82 13.97,18.89 14.22,18.63 17.01,18.63 17.14,18.5 17.14,16.35 17.39,16.09 17.9,16.09 | R6.2 17.9,16.09 | R5.1 17.9,16.09
  Bottom 0.406: U$4.5 15.49,23.2
N$14
  Top 0.203: C105.+ 4.19,11.77 5.2,10.76 5.2,7.96 5.47,7.69 U$1.6 6.15,7.13 6.09,7.07 6.13,7.04 U$1.7
N$15
  Top 0.203: 11.12,6.39 U$1.1 12,7.01 11.97,7.04 | C102.2 10.7,5.97 11.12,6.39 | 11.97,7.04 11.93,7.07 | 11.97,7.04 U$1.2 | 11.12,6.39 11.09,6.39 8.39,9.09 R103.2
N$16
  Top 0.203: C102.1 12.41,5.93 13.2,5.93 R102.2 13.7,5.55 14.73,5.55 15.24,6.06 R101.1
N$17
  Top 0.203: U$1.3 12.84,7.69 13.2,7.33 | C103.1 14.22,6.31 13.2,7.33 | 13.2,7.33 R102.1
N$18
  Top 0.203: C105.- 4.19,9.36 4.44,9.11 R104.1
N$19
  Top 0.203: U$1.5 6.15,9.49 5.84,9.49 | 5.84,9.49 C104.1 | 5.84,9.49 R103.1
N$21
  Top 0.203: R2.2 29.46,19.01 29.87,19.43 LED1.A
N$22
  Top 0.203: R3.2 29.46,21.81 29.87,22.22 LED2.A
N$28
  Bottom 0.203: R12.1 29.59,32.6 C77.PLUS 29.59,23.33 27.81,21.55 27.81,18.63 27.05,17.87 27.05,17.49 C10.1 | C10.1 26.92,17.58 26.92,17.61 27.05,17.61 | U$6.11 29.56,17.61 27.05,17.61 | 27.05,17.61 27.01,17.58 C10.1
N$29
  Bottom 0.203: D1.3 26.62,30.32 26.54,30.32 26.54,32.33 R12.2
PPM_IN
  Top 0.203: RC_RX.3 2.15,12.28 3.42,13.55 3.42,15.84 3.93,16.35 5.46,16.35 5.84,15.96 FBW.30
SERV_0
  Top 0.203: X9.3 12.8,4.01 13.58,4.79 16,4.79 16.38,5.17 16.38,6.57 16.69,6.88 U$5.5
SERV_1
  Top 0.203: X8.3 10.05,4.79 12.7,4.79 13.08,5.17 15.74,5.17 16,5.42 16,7.07 16.45,7.53 U$5.4
SERV_2  (via drill 0.35)
  Top 0.203: v18.66,11.39 19.55,11.39 20.95,12.79 21.33,12.79 23.49,14.95 23.49,15.46 26.16,18.12 26.16,24.98 23.36,27.78 21.97,27.78 21.2,28.54 v21.2,29.93 | U$5.3 17.86,8.18 18.03,8.34 18.03,9.36 18.41,9.74 v19.68,9.74
  Bottom 0.203: v18.66,11.39 18.92,11.14 18.92,10.5 v19.68,9.74 | v21.2,29.93 20.57,30.57
  pour Bottom (no thermals): 20.57,29.93 15.62,29.93 15.62,31.33 20.57,31.33
SERV_4
  Top 0.203: X10.3 16.23,3.64 17.52,3.64 17.9,4.03 17.9,4.41 18.28,4.79 19.68,4.79 22.42,7.53 U$5.13
SERV_5
  Top 0.203: U$5.12 22.4,6.88 19.53,4.01 X11.3
SERV_6
  Top 0.203: U$5.11 22.39,6.23 22.09,5.93 22.09,4.41 22.47,4.03 X12.3
USB+
  Top 0.203: R9.1 9.14,31.33 9.09,31.38 SERIAL_2.7
USB-
  Top 0.203: R10.1 10.41,31.33 10.34,31.33 SERIAL_2.8
VBAT
  pour Bottom (no thermals): 15.62,28.92 21.08,28.92 22.73,27.27 22.73,21.17 20.57,19.01 14.35,19.01 14.35,19.77 18.03,19.77 18.92,20.66 18.92,24.35 20.95,24.35 20.95,26.89 20.7,27.14 15.62,27.14
VIDEO
  Top 0.254: CAM.3 5.46,4.03 5.45,4.02 TX.3

## Text on the board
tDocu: SERIAL 2 | ANALOG | Paparazzi Tiny V0.9 | by Martin & Poine | L2 | L1 | SERIAL 1 | RC | TX | CAM | S1 | S2 | S3 | S4 | S6